# Altium PCB WattmeterPCB.PcbDoc
Units mil, origin at the board's own origin, x right, y up, seen from the top; angles counter-clockwise.
Board outline 3249 x 2500 mil, 2 copper layers (Top Layer, Bottom Layer); 44 components, 33 nets, 116 pads, 18 vias.
Unrouted connection lines stored in the file: 1.
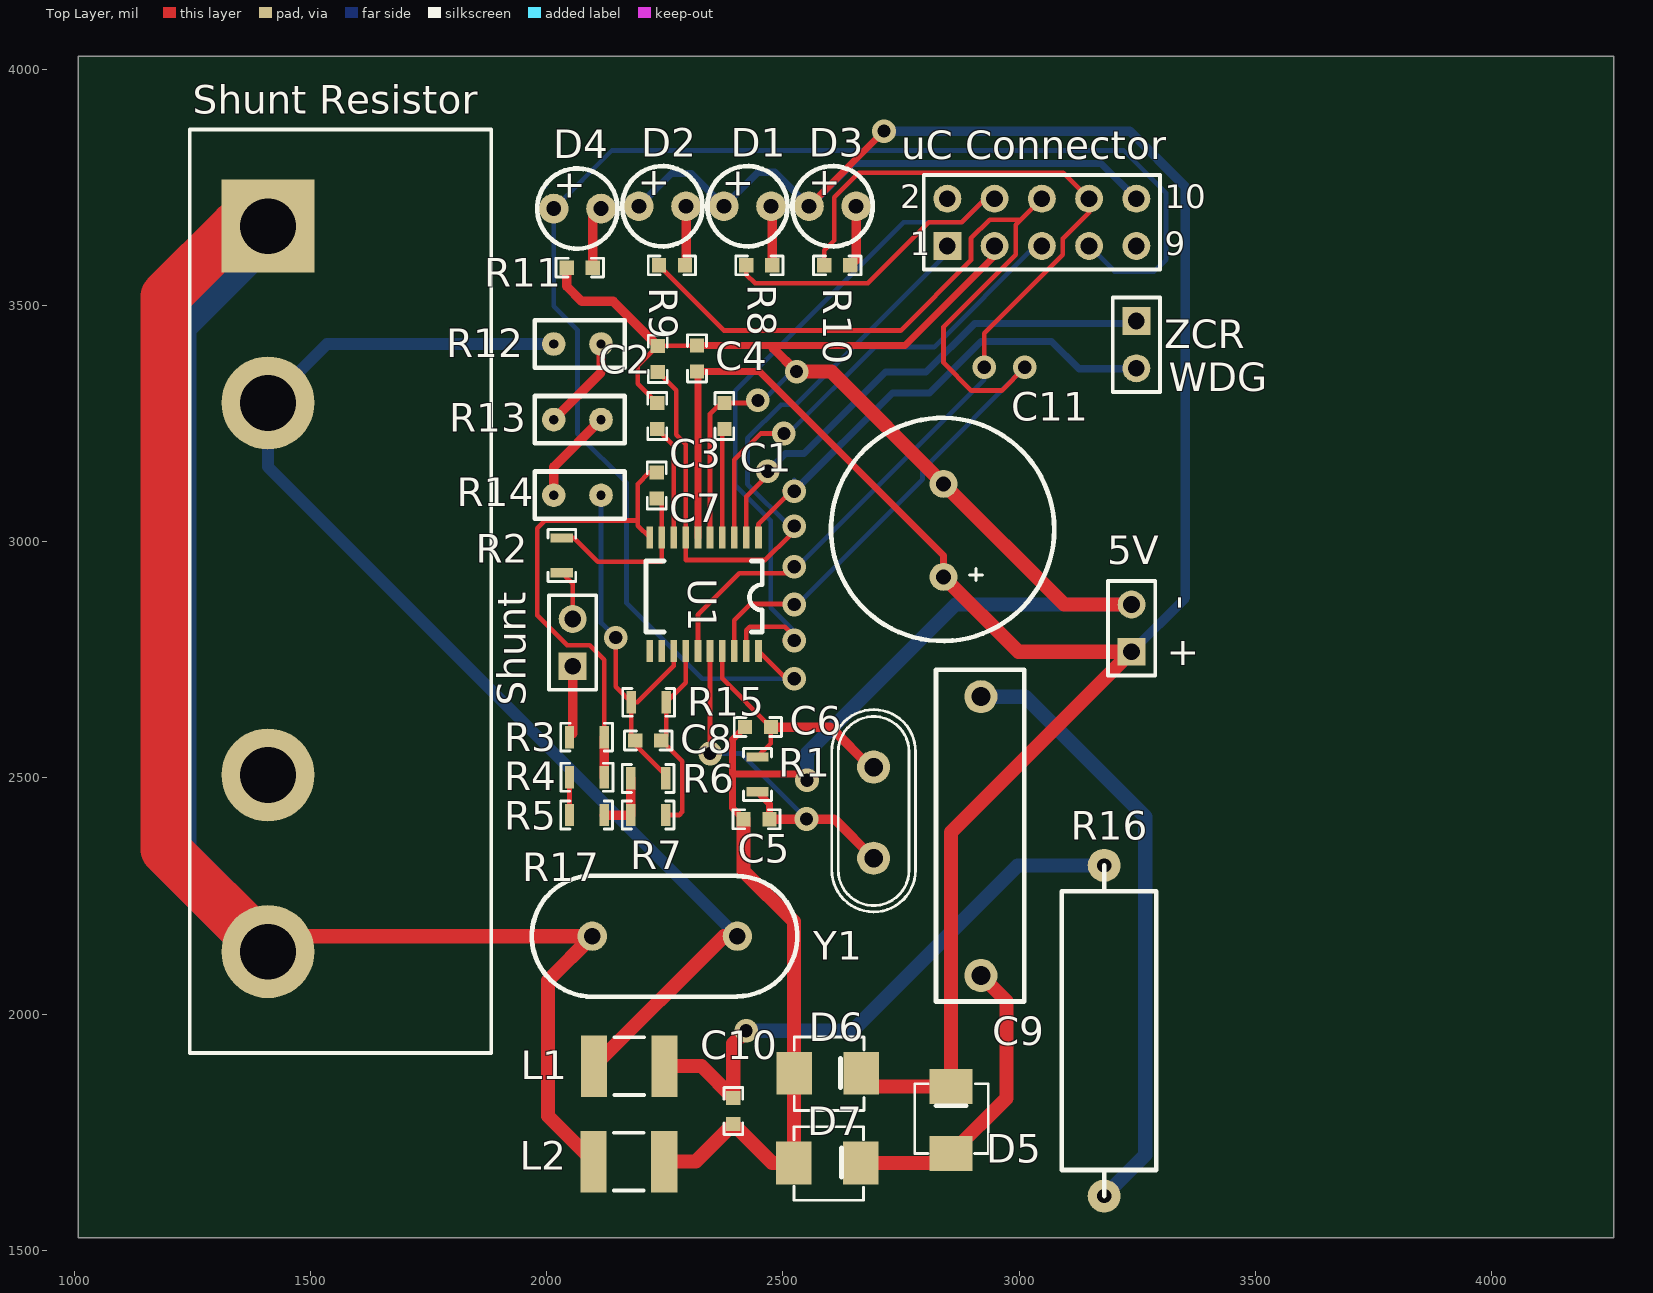
[diagram p0: Top Layer view]
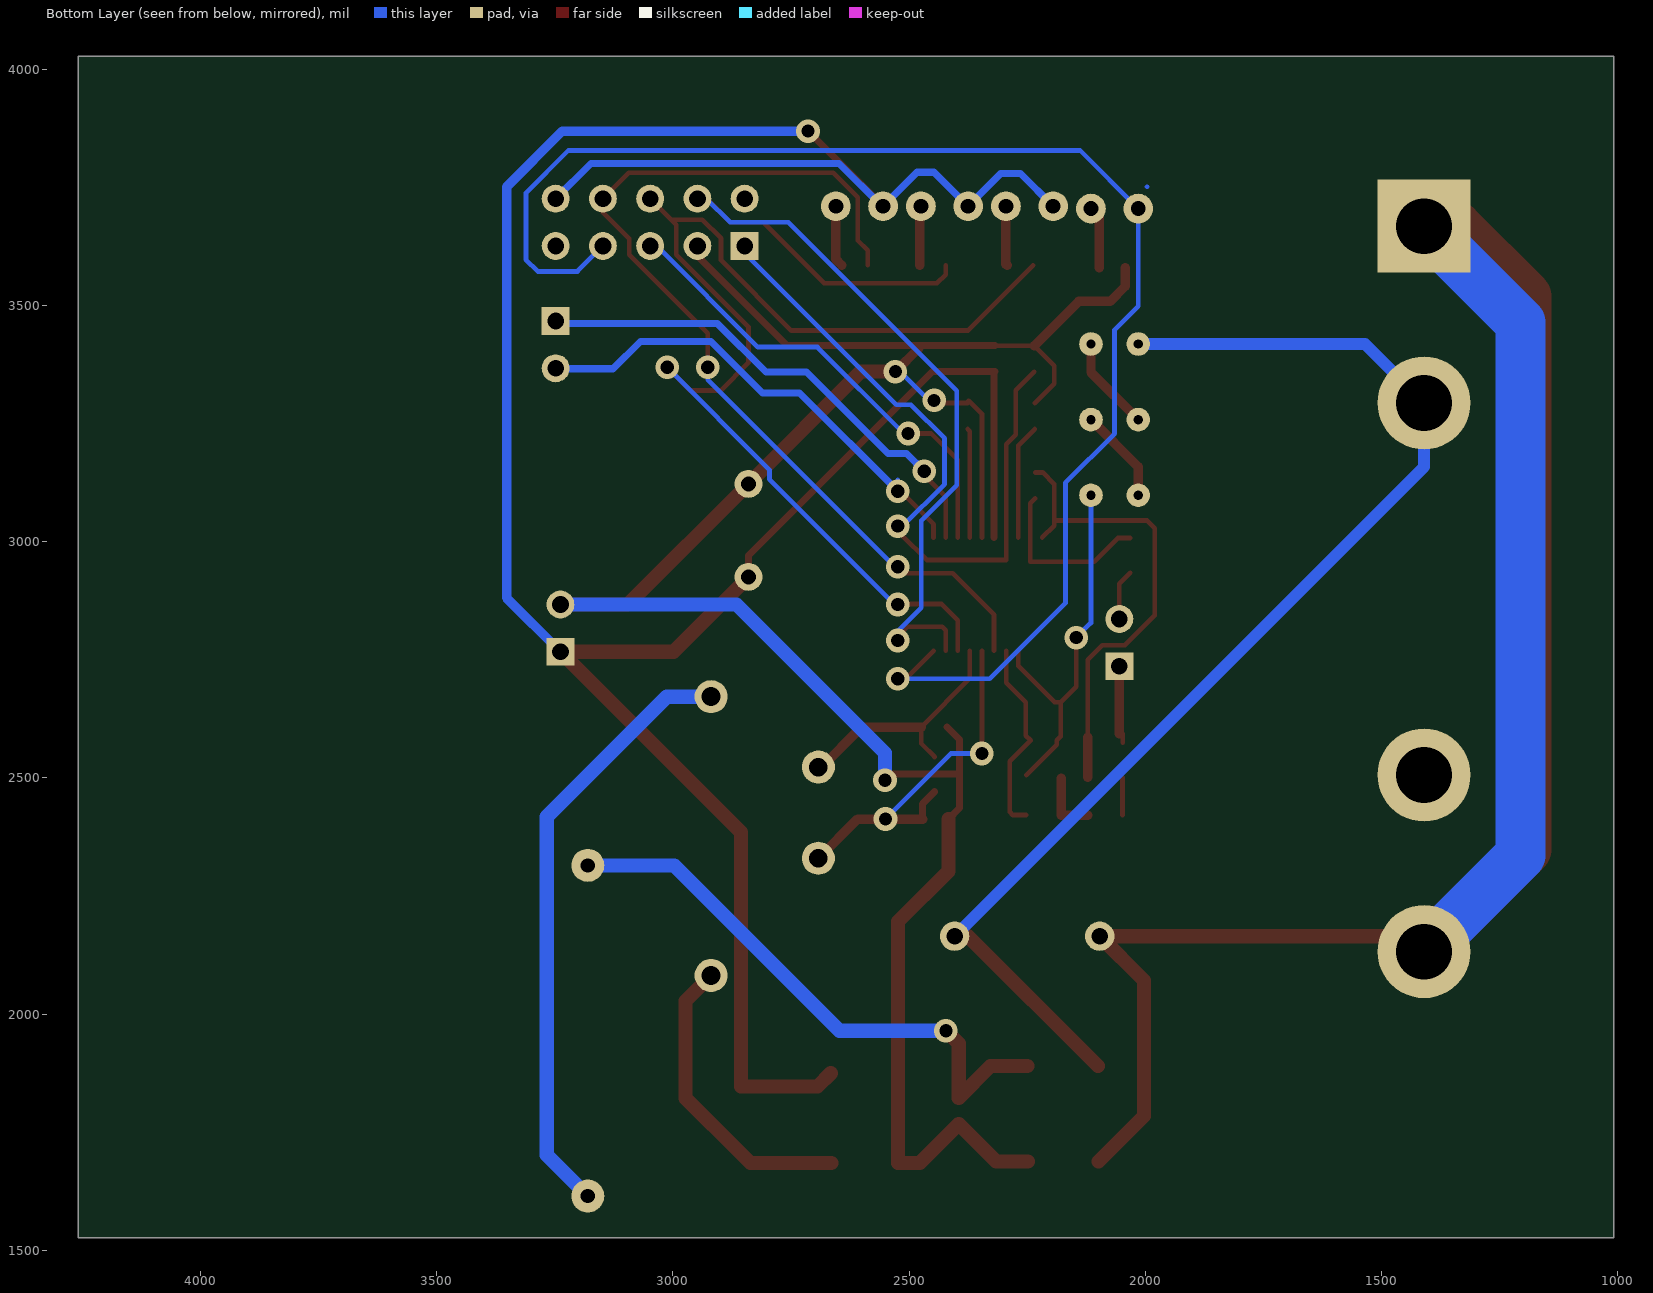
[diagram p1: Bottom Layer view, seen from below]
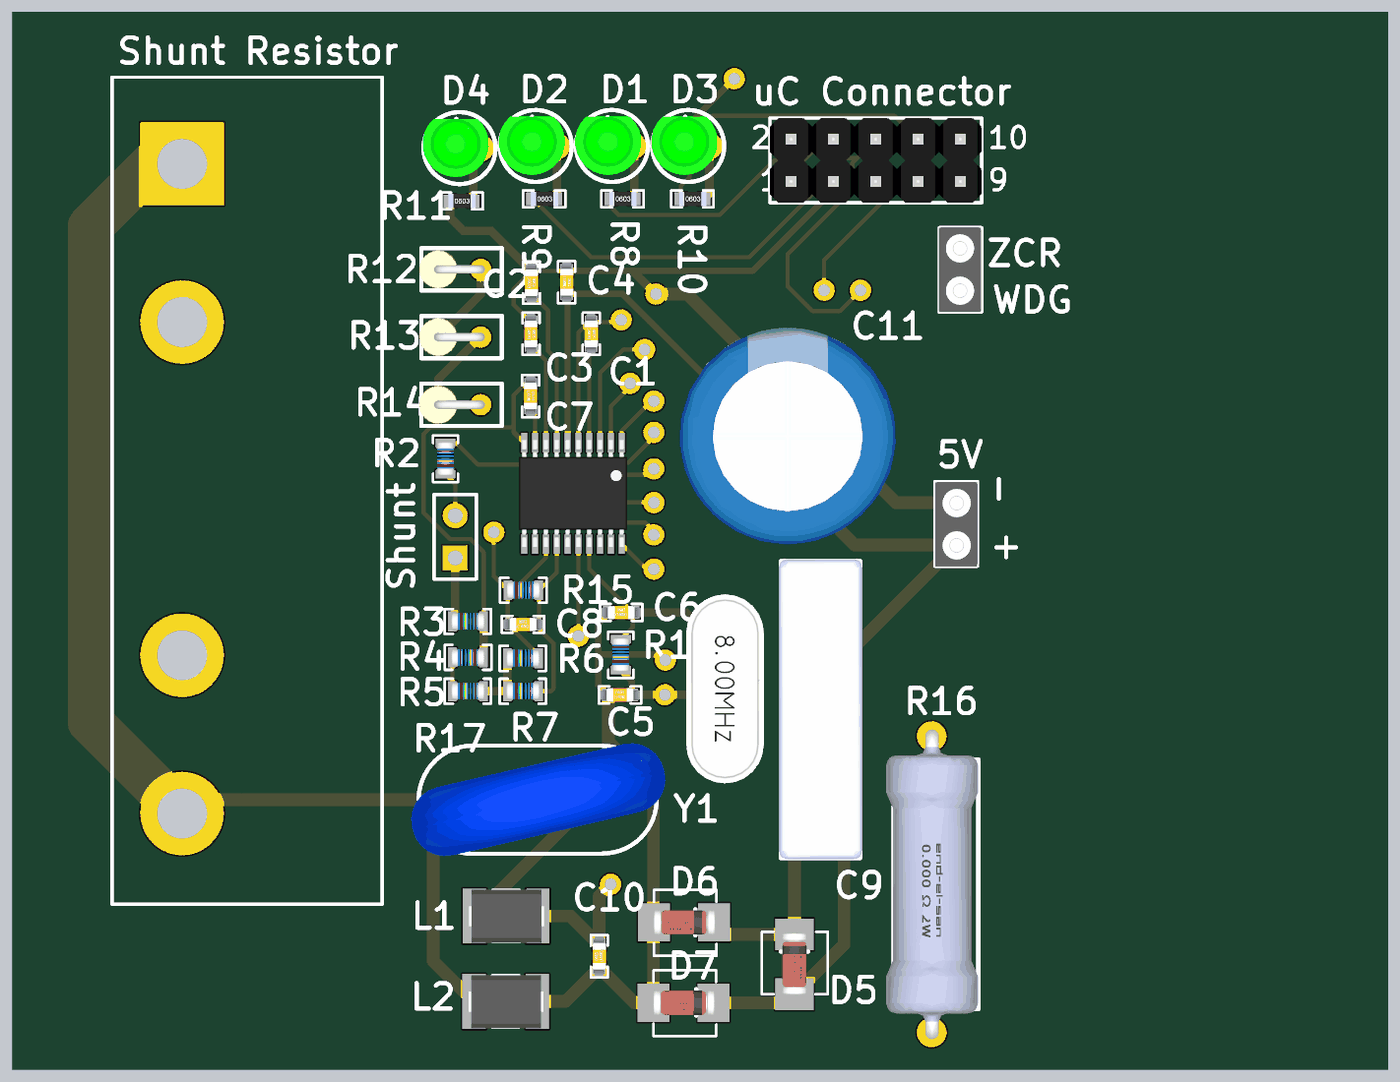
[diagram p2: 3D render of the assembled board from above, using the file's embedded part models]

## Layer stack, top to bottom
Top Solder: solder mask 0.4, Solder Resist, Dk 3.5
Top Layer: signal copper 1.4
Dielectric 1: dielectric 12.6, FR-4, Dk 4.8
Bottom Layer: signal copper 1.4
Bottom Solder: solder mask 0.4, Solder Resist, Dk 3.5

## Board outline
1009,1527 4258,1527 4258,4027 1009,4027

## Design rules (kind name [scope] priority, off if disabled: settings)
Clearance [All] p1: gap=10
PolygonConnect [All] p1: connectstyle=Relief reliefconductorwidth=10 reliefentries=4 polygonreliefangle="90 Angle" airgapwidth=10
RoutingVias [All] p1: holewidth=28 width=50 viastyle="Through Hole" minholewidth=28 minwidth=50 maxholewidth=28 maxwidth=50
SolderMaskExpansion [All] p1: expansion=4
Width [All] p1: maxlimit=118.11 minlimit=10 preferedwidth=10 minimp=50.000000 maximp=50.000000 favimp=50.000000
30 further rules are at their usual default settings.

## Classes and differential pairs
component class WattmeterV1.1: C2 C3 C5 C6 C7 C8 C9 C10 C11 D1 D2 D3 D4 D5 D6 D7 L1 L2 R1 R2 R3 R4 R5 R6 R7 R8 R9 R10 R11 R12 R13 R14 R15 R16 R17 Shunt "Shunt Resistor" U1 "uC Connector" WDG Y1

## Components (designator, comment, footprint, x,y, rotation, side; value= is the part's Value field where it differs from the comment)
5V "Header 2" "Male header 2x1" 3238,2817 r90 top
C1 "Cap" "Cap SMD 0603" 2376,3266 r270 top
C2 "Cap" "Cap SMD 0603" 2235,3387 r270 top
C3 "Cap" "Cap SMD 0603" 2234,3266 r270 top
C4 "Cap" "Cap SMD 0603" 2318,3388 r270 top
C5 "Cap" "Cap SMD 0603" 2444,2412.57 r0 top
C6 "Cap" "Cap SMD 0603" 2447,2607.57 r0 top
C7 "Cap" "Cap SMD 0603" 2233,3119 r270 top
C8 "Cap" "Cap SMD 0603" 2215,2579.43 r0 top
C9 "Cap" "Cap Tenta MKP 470nF X2" 2919,2377 r90 top
C10 "Cap" "Cap SMD 0603" 2395,1795 r90 top
C11 "Cap Pol2" "Cap Pol" 2840,3024 r0 top
D1 "LED1" "LED Green" 2425,3710 r90 top
D2 "LED1" "LED Green" 2245,3710 r90 top
D3 "LED1" "LED Green" 2605,3710 r90 top
D4 "LED1" "LED Green" 2065,3705 r90 top
D5 "Diode 1N4448" "Diode SMD" 2856,1776 r180 top
D6 "D Zener" "Diode SMD" 2595,1875 r90 top
D7 "Diode 1N4448" "Diode SMD" 2594,1685 r90 top
L1 "Inductor" "Inductor SMD" 2175,1890 r0 top
L2 "Inductor" "Inductor SMD" 2174,1688 r0 top
R1 "Res1" "res 0102" 2446,2507.57 r180 top
R2 "Res1" "Res 0102" 2032,2971 r180 top
R3 "Res1" "Res 0102" 2085,2586.43 r90 top
R4 "Res1" "res 0102" 2085,2501.43 r270 top
R5 "Res1" "res 0102" 2085,2421.43 r90 top
R6 "Res1" "res 0102" 2215,2499 r90 top
R7 "Res1" "res 0102" 2215,2421.43 r90 top
R8 "Res1" "RES SMD 0603" 2450,3585 r0 top
R9 "Res1" "RES SMD 0603" 2265,3585 r0 top
R10 "Res1" "RES SMD 0603" 2615,3585 r0 top
R11 "Res1" "RES SMD 0603" 2070,3580 r0 top
R12 "Res1" "Res Vertical" 2065,3418.43 r0 top
R13 "Res1" "Res Vertical" 2065,3258.43 r0 top
R14 "Res1" "Res Vertical" 2065,3098.43 r0 top
R15 "Res1" "Res 0102" 2216,2660 r90 top
R16 "Res1" "Res 0.7in" 3180,1965 r270 top
R17 "Res Varistor" Varistor 2250,2165 r0 top
Shunt "Header 2" HDR1X2 2055,2736.43 r90 top
"Shunt Resistor" "Shunt Resistor" "Power Connector+ Shunt" 1410,2900 r270 top
U1 "STPM10" STPM10 2333,2889 r180 top
"uC Connector" "Header 5X2" "Male Header 2x5" 3048,3676 r0 top
WDG "Header 2" "Male header 2x1" 3248,3417 r270 top (schematic designator WDG_ZCR)
Y1 "XTAL" Xtal 2692,2430 r270 top

## Footprints (in the part's own frame and the unit in brackets; to place one, negate y for a bottom-side part, rotate by r counter-clockwise, add the part's x,y. Pads: shape width x height; smd on the part's side, far side on the other; paste and mask are expansions set on the pad)
"Cap Pol" [mm] "Cap Pol 4700uF 10V"
  round 1.5 hole 0.8: 1(0,-2.5) 2(0,2.5)
  silkscreen extent -6.05,-5.95 5.95,6.05, body extent -6.5,-6.5 6.5,6.5, height 25
"Cap SMD 0603" [mil] "Capacité SMD non polarisé"
  rect 30x30 smd: 1(-27.5,0) 2(27.5,0)
  silkscreen extent -50,-20 50,20, body extent -48,-16 48,16, height 32
"Cap Tenta MKP 470nF X2" [mil] "Cap Tenta MKP 470nF X2 - 0.6in"
  round 70 hole 40: 1(-295,0) 2(295,0)
  silkscreen extent -350,-92 352,95, body extent -352,-97 356,100, height 433
"Diode SMD" [mm]
  rect 2.3x1.9 smd: 1(0,1.8) 2(0,-1.8)
  silkscreen extent -2,-1.95 1.95,1.8, body extent -0.8,-1.88 0.8,1.82, height 1.6
HDR1X2 [mm] "Connector; Header; 2 Position"
  rect 1.5x1.5 hole 0.9: 1(0,0)
  round 1.5 hole 0.9: 2(2.54,0)
  silkscreen extent -1.27,-1.27 3.81,1.27
"Inductor SMD" [mm]
  rect 1.4x3.3 smd: 1(-1.9,0) 2(1.9,0)
  silkscreen extent -0.8,-1.55 0.8,1.55, body extent -2.22,-1.61 2.28,1.59, height 3.2
"LED Green" [mm]
  round 1.6 hole 0.8: 1(0,1.27) 2(0,-1.27)
  silkscreen extent -2.16,-2.16 2.16,2.16, body extent -1.74,-1.76 1.75,2.22, height 5.38
"Male header 2x1" [mm]
  rect 1.5x1.5 hole 0.9: 1(-1.27,0)
  round 1.5 hole 0.9: 2(1.27,0)
  silkscreen extent -2.54,-1.27 2.54,1.27, body extent -2.57,-1.3 2.51,1.24, height 6.02
"Male Header 2x5" [mm]
  rect 1.5x1.5 hole 0.9: 1(-5.08,-1.27)
  round 1.5 hole 0.9: 2(-5.08,1.27) 3(-2.54,-1.27) 4(-2.54,1.27) 5(0,-1.27) 6(0,1.27) 7(2.54,-1.27) 8(2.54,1.27) 9(5.08,-1.27) 10(5.08,1.27)
  silkscreen extent -6.35,-2.54 6.35,2.54, body extent -6.36,-2.55 6.34,2.53, height 8.38
"Power Connector+ Shunt" [mm]
  round 5 hole 3: 1(10,0) 2(-10,0) 4(19.5,0)
  rect 5x5 hole 3: 3(-19.5,0)
  silkscreen extent -24.7,-4.2 24.95,12
"Res 0.7in" [mil]
  round 70 hole 30: 1(-350,0) 2(350,0)
  silkscreen extent -350,-90 350,110, body extent -366,-107 366,109, height 217
"res 0102" [mm]
  rect 1.2x0.5 smd: 1(0,0.935) 2(0,-0.935)
  silkscreen extent -0.75,-1.38 0.75,1.4, body extent -0.54,-1 0.56,1, height 1.1
"Res 0102" [mm]
  rect 1.2x0.5 smd: 1(0,0.935) 2(0,-0.935)
  silkscreen extent -0.75,-1.39 0.75,1.4, body extent -0.54,-1 0.56,1, height 1.1
"RES SMD 0603" [mil]
  rect 30x30 smd: 1(-27.5,0) 2(27.5,0)
  silkscreen extent -50,-20 50,20, body extent -31,-17 33,17, height 17
"Res Vertical" [mil] "Res Mounted vertically - 0.1in"
  round 50 hole 20: 1(-50,0) 2(50,0)
  silkscreen extent -90,-50 100,50, body extent -95,-45 60,45, height 291
STPM10 [mm]
  rect 0.36x1.17 smd: 1(-2.925,-3.05) 2(-2.275,-3.05) 3(-1.625,-3.05) 4(-0.975,-3.05) 5(-0.325,-3.05) 6(0.325,-3.05) 7(0.975,-3.05) 8(1.625,-3.05) 9(2.275,-3.05) 10(2.925,-3.05) 11(2.925,3.05) 12(2.275,3.05) 13(1.625,3.05) 14(0.975,3.05) 15(0.325,3.05) 16(-0.325,3.05) 17(-0.975,3.05) 18(-1.625,3.05) 19(-2.275,3.05) 20(-2.925,3.05)
  silkscreen extent -3.13,-1.78 3.12,2.03, body extent -3.25,-3.2 3.25,3.2, height 1.2
Varistor [mm]
  round 1.574 hole 0.9: 1(-3.9,0) 2(3.9,0)
  silkscreen extent -7.15,-3.25 7.12,3.25, body extent -8,-3.79 8.05,3.79, height 18.5
Xtal [mil] "Quartz HC49"
  round 70 hole 39.37: 1(100,0) 2(-93,0)
  silkscreen extent -215,-89 214,89, body extent -220,-92 226,92, height 142

## Part data
5V Shunt WDG: "Header, 2-Pin"
C1 C2 C3 C4 C5 C6 C7 C8 C9 C10: "Capacitor"
C11: "Polarized Capacitor (Axial)"
D1 D2 D3 D4: "Typical RED GaAs LED"
D5 D7: "High Conductance Fast Diode"
D6: "Zener Diode"
R1 R2 R3 R4 R5 R6 R7 R8 R9 R10 R11 R12 R13 R14 R15 R16: "Resistor"
R17: "Varistor (Voltage-Sensitive Resistor)"
"uC Connector": "Header, 5-Pin, Dual row"
Y1: "Crystal Oscillator"

## Via types
v1: diameter 50, hole 28, Top Layer to Bottom Layer, 18 vias

## Nets (pads, with @x,y where several pads share a name; then routed paths per layer and width w, separated by ;. In a path a pad name is that pad's centre, name@x,y a point inside that pad or via, vN(x,y) a via of type N, cw(c..) or ccw(c..) an arc to the next point about the centre after c; other vN are vias at no path point)
CLKIN: C5.2 R1.1 U1.16 Y1.1 | length 802.6
  Top Layer w10: v1(2345.8,2551.8) U1.16
  Top Layer w15: R1.1 2471.5,2445.26 C5.2
  Top Layer w20: C5.2 2471.93,2413 v1(2550,2413) 2602,2413 2609,2413 Y1.1
  Bottom Layer w10: v1(2345.8,2551.8) 2411.2,2551.8 v1(2550,2413)
CLKOUT: C6.2 R1.2 U1.17 Y1.2 | length 529.5
  Top Layer w10: U1.17 2371.39,2710.69 C6.2 2474.5,2572.89 R1.2
  Top Layer w20: C6.2 2600.43,2607.57 Y1.2@2688.5,2519.5
LED: "uC Connector.7" D4.1 U1.20 | length 3138.2
  Top Layer w10: U1.20 v1@2507.08,2710 ; v1@2504,2710 v1@2517.84,2710
  Bottom Layer w10: v1(2524,2710) 2329,2710 2169,2870 2169,3124.43 2065,3228.43 2065,3448.43 2015,3498.43 D4.1 2138,3828 3221,3828 3311,3738 3311,3597 3286,3572 3202,3572 3148,3626
NetC7_1: C7.1 R3.2 R4.1 U1.10 | length 1006.9
  Top Layer w10: R3.2 2121.81,2749.88 2090.74,2780.95 2043.05,2780.95 1980,2844 1980,3028.43 1996.57,3045 2193,3045 ; U1.10 2193,3033.92 2193,3045 ; C7.1 2217.5,3146.5 2193,3122 2193,3045
  Top Layer w20: R4.1 R3.2
NetC7_2: C7.2 R2.2 U1.9 | length 370.7
  Top Layer w10: R2.2 2058.19,3007.81 2108.57,2957.43 2243.43,2957.43 U1.9 2243.43,3081.07 C7.2
NetC8_1: C8.1 R6.2 R14.2 R15.1 U1.13 | length 802.5
  Top Layer w10: v1(2146,2797) 2146,2693.19 R15.1 ; R6.2@2251.81,2506.19 2187.5,2570.5 C8.1 2179.19,2587.74 R15.1 ; U1.13 2269,2737 2192,2660 R15.1
  Bottom Layer w10: R14.2 2115,2828 v1(2146,2797)
NetC8_2: C8.2 R7.2 R15.2 U1.14 | length 418.9
  Top Layer w10: R7.2 2280.43,2421.43 2287,2428 2287,2534.93 C8.2 2252.81,2589.74 R15.2 2294.61,2701.8 U1.14
NetC9_1: C9.1 D5.1 D7.2 | length 647.2
  Top Layer w30: D7.2 2835.87,1685 D5.1 2973,1822.13 2973,2028 C9.1
NetC9_2: C9.2 R16.2 | length 1292.2
  Bottom Layer w30: C9.2 3013,2672 3267,2418 3267,1702 R16.2
NetC10_2: C10.2 L1.2 R16.1 | length 1229.8
  Top Layer w30: L1.2 2327.5,1890 C10.2 2395,1938 v1(2422,1965)
  Bottom Layer w30: v1(2422,1965) 2647,1965 2997,2315 R16.1
NetD1_2: D1.2 R8.2 | length 122.5
  Top Layer w20: R8.2 D1.2@2477.5,3707.5
NetD2_2: D2.2 R9.2 | length 126
  Top Layer w20: R9.2 2295,3587.5 D2.2
NetD3_2: D3.2 R10.2 | length 130.2
  Top Layer w20: R10.2 2655,3597.5 D3.2
NetD4_2: D4.2 R11.2 | length 132.2
  Top Layer w20: R11.2 2097.5,3687.5 D4.2
NetL1_1: "Shunt Resistor.2" L1.1 R12.1 R17.2 | length 2614.2
  Top Layer w25: R17.2@2375.2,2165 R17.2
  Top Layer w30: L1.1 R17.2@2375.2,2165
  Bottom Layer w25: R12.1 1534.73,3418.43 1410,3293.7 1410,3158.54 R17.2
NetL2_1: "Shunt Resistor.3" "Shunt Resistor.4" L2.1 R17.1 | length 4715.2
  Top Layer w30: 1410,2132.28 1442.72,2165 R17.1 2003,2071.54 2003,1784.2 L2.1
  Top Layer w106.3: 1410,2132.28 1193,2349.28 1193,3519 1341.72,3667.72 1410,3667.72
  Bottom Layer w106.3: 1410,2132.28 1206,2336.28 1206,3463.72 1410,3667.72
NetR2_1: R2.1 Shunt.2 | length 107.3
  Top Layer w10: R2.1 2055,2911.19 Shunt.2
NetR3_1: R3.1 Shunt.1 | length 161.9
  Top Layer w10: R3.1@2047.83,2574.54 R3.1@2047.83,2593.24
  Top Layer w20: R3.1@2055,2593.24 Shunt.1
NetR4_2: R4.2 R5.1 | length 80
  Top Layer w10: R5.1 R4.2
NetR5_2: R5.2 R6.1 R7.1 | length 134
  Top Layer w20: R5.2 R7.1 R6.1
NetR12_2: R12.2 R13.1 | length 201.4
  Top Layer w20: R13.1 2115,3358.43 R12.2
NetR13_2: R13.2 R14.1 | length 201.4
  Top Layer w20: R14.1 2015,3158.43 R13.2
SCL: "uC Connector.6" R9.1 U1.18 | length 2521.5
  Top Layer w10: R9.1 2375.5,3447 2749.27,3447 2898,3595.73 2898,3642 2937.47,3681.47 3003.47,3681.47 ; U1.18 2396.98,2833.98 2431,2868 v1@2535,2868 ; v1@2505,2868 2504,2867 v1@2508,2867 ; v1(3012,3369) 2963,3320 2899,3320 2840,3379 2840,3455.03 2992.53,3607.56 2992.53,3670.53 3003.47,3681.47 ; 3048,3726 3003.47,3681.47
  Bottom Layer w10: v1@2530,2867 2795.47,3132.47 2795.47,3152.47 v1(3012,3369)
  other v1: 2524,2867
SCS: "uC Connector.5" U1.3 | length 1002.6
  Top Layer w10: U1.3 2396.98,3172.98 2453,3229 v1(2502,3229)
  Bottom Layer w10: v1(2502,3229) 2511,3229 2694,3412 2820,3412 3034,3626 3048,3626
SDA: "uC Connector.4" R8.1 U1.19 | length 2083.2
  Top Layer w10: R8.1 2422.5,3565.5 2441,3547 2679.94,3547 2808.94,3676 2878,3676 2928,3726 2948,3726 ; U1.19 2422.57,2812.57 2430,2820 2504,2820 v1@2533,2791 ; v1@2504,2791 v1@2513,2791
  Bottom Layer w10: v1@2524,2810.43 2474,2860.43 2474,3044.72 2399,3119.72 2399,3319.57 2755.43,3676 2879,3676 2929,3726 2948,3726
  other v1: 2524,2791
SYN: "uC Connector.8" R10.1 U1.15 | length 2099.9
  Top Layer w10: U1.15 2320.2,2845.2 2408,2933 v1@2516,2933 ; v1@2504,2933 v1@2518,2947 ; R10.1 2587.5,3616.5 2608.5,3637.5 2608.5,3729.26 2660.24,3781 3093,3781 3148,3726 3148,3697 3092.53,3641.53 3092.53,3607.56 2926,3441.03 v1@2926,3368
  Bottom Layer w10: v1@2530,2947 2926,3343 ; v1@2926,3364 v1@2926,3389
  other v1: 2524,2947 2926,3369
VDD: 5V.1 "uC Connector.10" C4.2 C11.1 D1.1 D2.1 D3.1 D5.2 D6.2 U1.6 | length 6006.8
  Top Layer w10: C4.2 C4.2@2320.2,3358.3
  Top Layer w15: C4.2 2450.5,3360.5 2840,2971 C11.1 ; U1.6 C4.2@2320.2,3358.3 ; D3.1 v1(2714,3869)
  Top Layer w30: D6.2 2694,1846.87 D5.2 2856,2385 5V.1 2998.57,2767 C11.1
  Bottom Layer w10: 1995.74,3751.5 1996.5,3751.5
  Bottom Layer w15: D2.1 2264,3779 2306,3779 D1.1 2447,3782 2483,3782 D3.1 2557.5,3710 2648,3800.5 3173.5,3800.5 3248,3726
  Bottom Layer w20: v1(2714,3869) 3234,3869 3352,3751 3352,2881 5V.1
VDDA: C3.2 U1.8 | length 243.9
  Top Layer w10: C3.2 2269.02,3203.48 U1.8
VDDD: C1.2 U1.4 | length 231.3
  Top Layer w10: U1.4 2371.39,3233.89 C1.2
VO: "uC Connector.1" C2.2 U1.7 | length 1486.8
  Top Layer w10: C2.2 2274,3320.5 2274,3226.78 2294.61,3206.17 U1.7 2294.61,2961.39 2462.39,2961.39 v1@2514,3013
  Bottom Layer w10: v1@2514,3033 2425,3122 2425,3219 2496,3290 2527,3290 2848,3611 2848,3626
  other v1: 2524,3033
VSS: 5V.2 "uC Connector.3" C1.1 C2.1 C3.1 C4.1 C5.1 C6.1 C10.1 C11.2 D6.1 D7.1 L2.2 R11.1 U1.5 | length 5079.8
  Top Layer w10: C3.1 2193,3334.5 2193,3372.5 C2.1 C4.1@2317,3414.5 ; U1.5 2345.8,3270.31 C1.1@2374,3298.51 ; C1.1 2427.5,3293.5 2433,3299 v1(2447,3299) ; v1@2550.39,2495.61 v1(2551,2495) ; 2948,3605 2948,3617.45
  Top Layer w15: C4.1 2479.5,3415.5 ; C5.1 2393,2436.07 2393,2508 ; C6.1 2393,2581.07 2393,2508 ; 2482.5,3412.5 2479.5,3415.5 ; v1(2551,2495) 2538,2508 2393,2508 ; 2948,3605 2758.5,3415.5 2479.5,3415.5
  Top Layer w20: R11.1 2042.5,3540.5 2074,3509 2140.5,3509 C2.1 ; 2479.5,3409.5 v1(2529,3360)
  Top Layer w30: L2.2 2315.5,1688 C10.1 2477.5,1685 D7.1 2523.13,2195.87 2416.5,2302.5 C5.1 ; v1(2529,3360) 2602.43,3360 C11.2 3095.43,2867 5V.2
  Bottom Layer w10: v1(2447,3299) 2458,3299 2519,3360 v1(2529,3360)
  Bottom Layer w30: v1(2551,2495) 2551,2553 2865,2867 5V.2
WDG: U1.1 WDG.2 | length 1043.8
  Top Layer w10: U1.1 2448.16,3037.16 v1@2520,3109 ; v1@2504,3107 v1@2506,3107 ; v1@2504,3109 v1@2506,3107 ; v1@2511,3107 v1@2506,3107
  Bottom Layer w10: v1(2524,3107) v1@2524,3131
  Bottom Layer w15: v1(2524,3107) 2732,3315 2810,3315 2919,3424 3068.5,3424 3126.5,3366 WDG.2@3249,3366
ZCR: U1.2 WDG.1 | length 1066.4
  Top Layer w10: U1.2 2422.57,3095.57 2468,3141 v1(2468,3149)
  Bottom Layer w15: v1(2468,3149) 2505.5,3186.5 2544.5,3186.5 2717,3359 2803,3359 2906,3462 WDG.1@3246,3462
pads on no net: "Shunt Resistor.1" "uC Connector.2" "uC Connector.9" U1.11 U1.12

## Silkscreen, mask and mechanical layers (free items; w line width, h text height)
Top Overlay:
  lines w10: 2622,1844 2622,1906 ; 2624,1655 2624,1717 ; 2824,1806 2888,1806
  text "+" at 2193,3733 h60
  text "+" at 2554,3733 h60
  text "+" at 2371,3732 h60
  text "+" at 2014,3728 h60
  text "ZCR" at 3307,3409.01 h60
  text "-" at 3362,2856 h60 r90
  text "+" at 3312,2738 h60
Mechanical 1:
  lines w10: 3518,765 3520,767 ; 1009,1527 4258,1527 4258,4027 1009,4027 1009,1527

## Text inside footprints (layer, text, board x,y; h text height)
"uC Connector": Top Overlay "2" at 2748,3706 h50; Top Overlay "1" at 2768,3606 h50; Top Overlay "9" at 3308,3606 h50; Top Overlay "10" at 3308,3706 h50